# Altium PCB Bhishma_SlaveLayout.PcbDoc (part 1 of 2)
Units mil, origin at the board's own origin, x right, y up, seen from the top; angles counter-clockwise.
Board outline 3750 x 3500 mil, 3 copper layers (Top Layer, Internal Plane 13, Bottom Layer); 96 components, 63 nets, 347 pads, 425 vias.
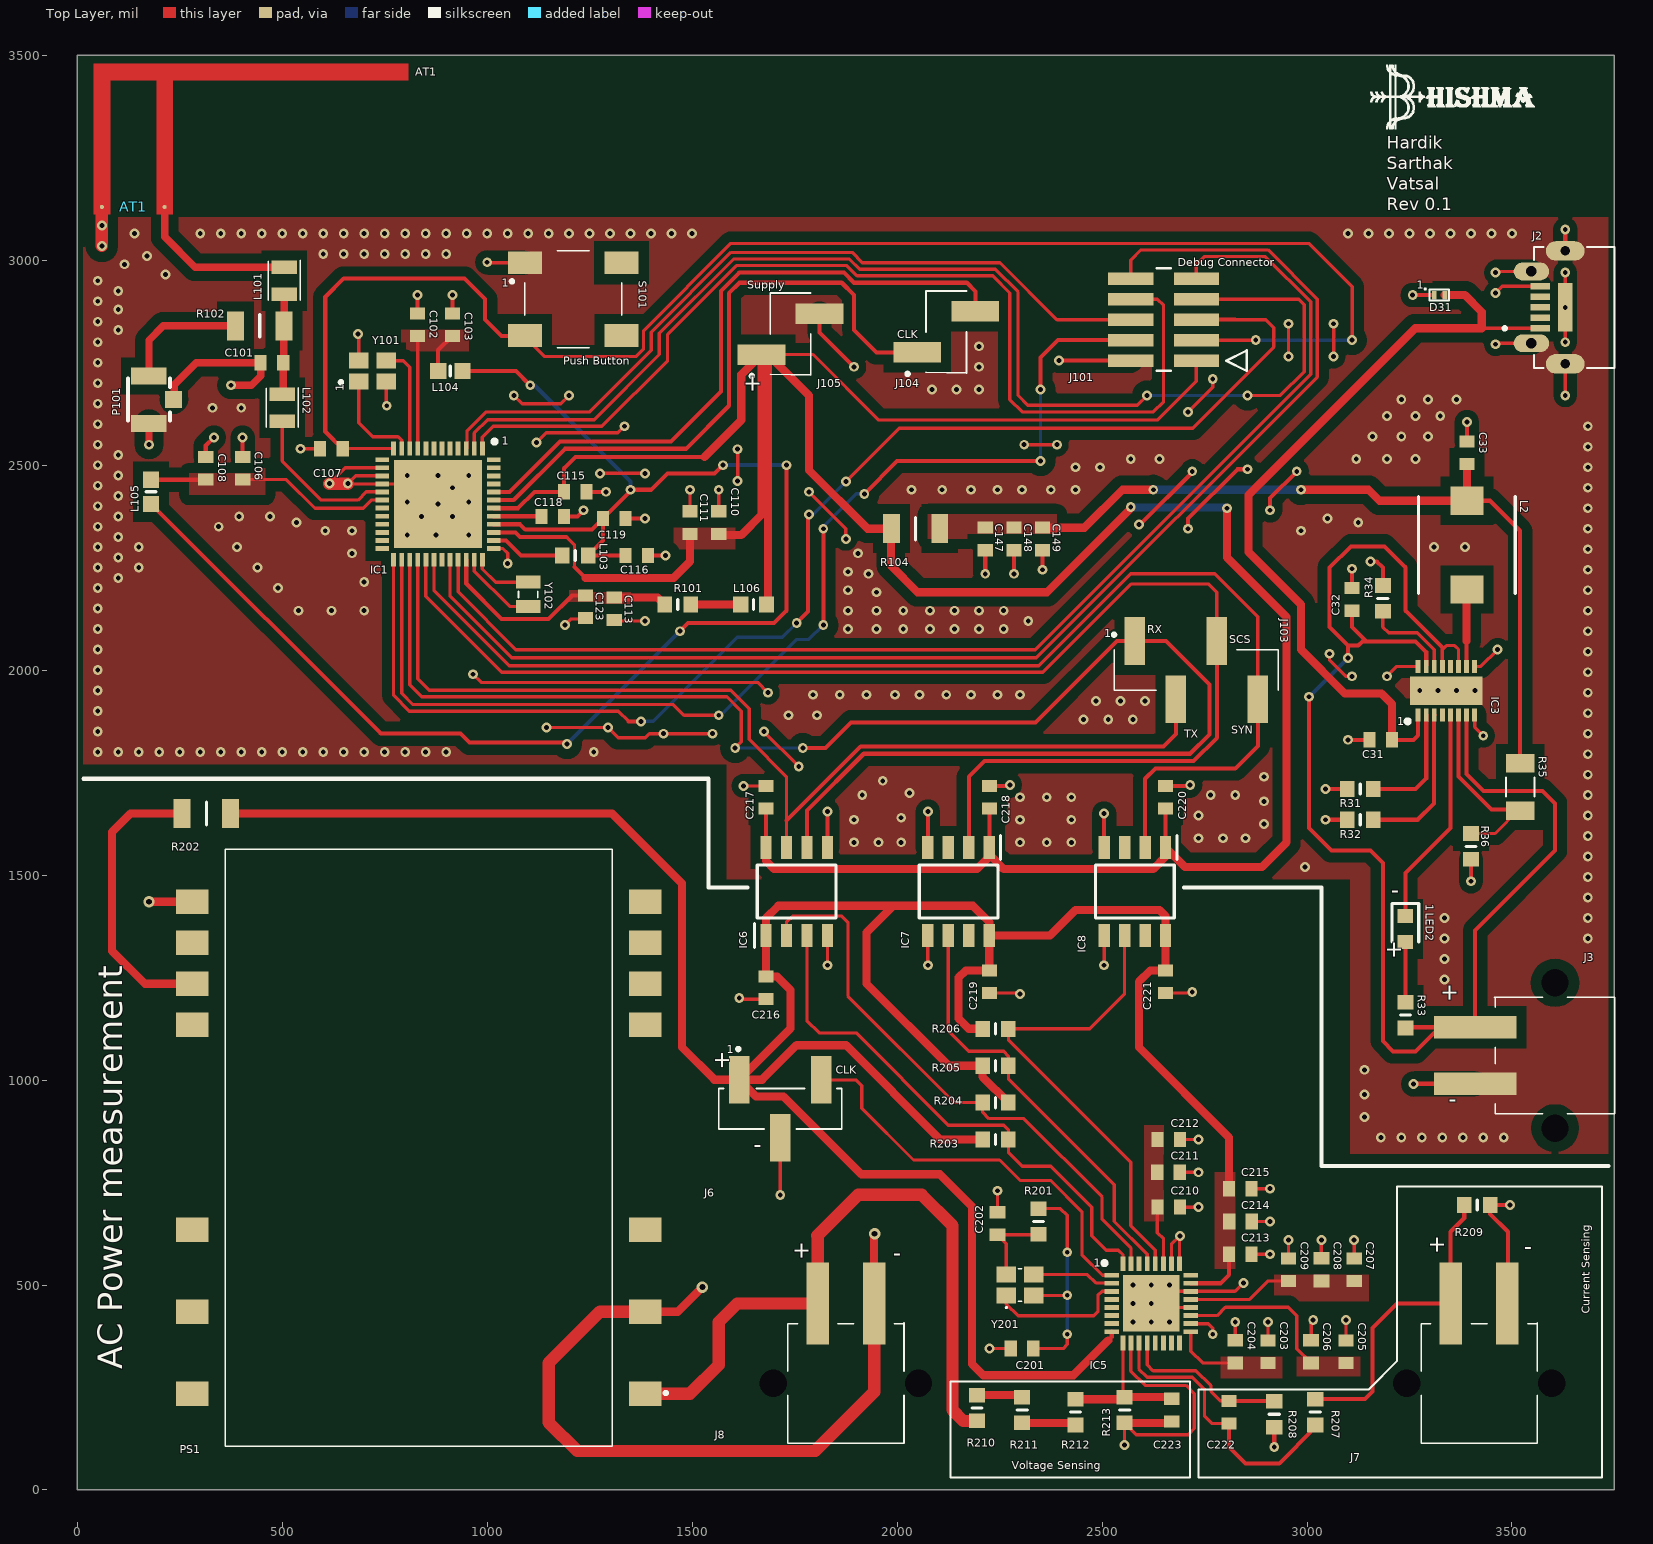
[diagram p0: Top Layer view]
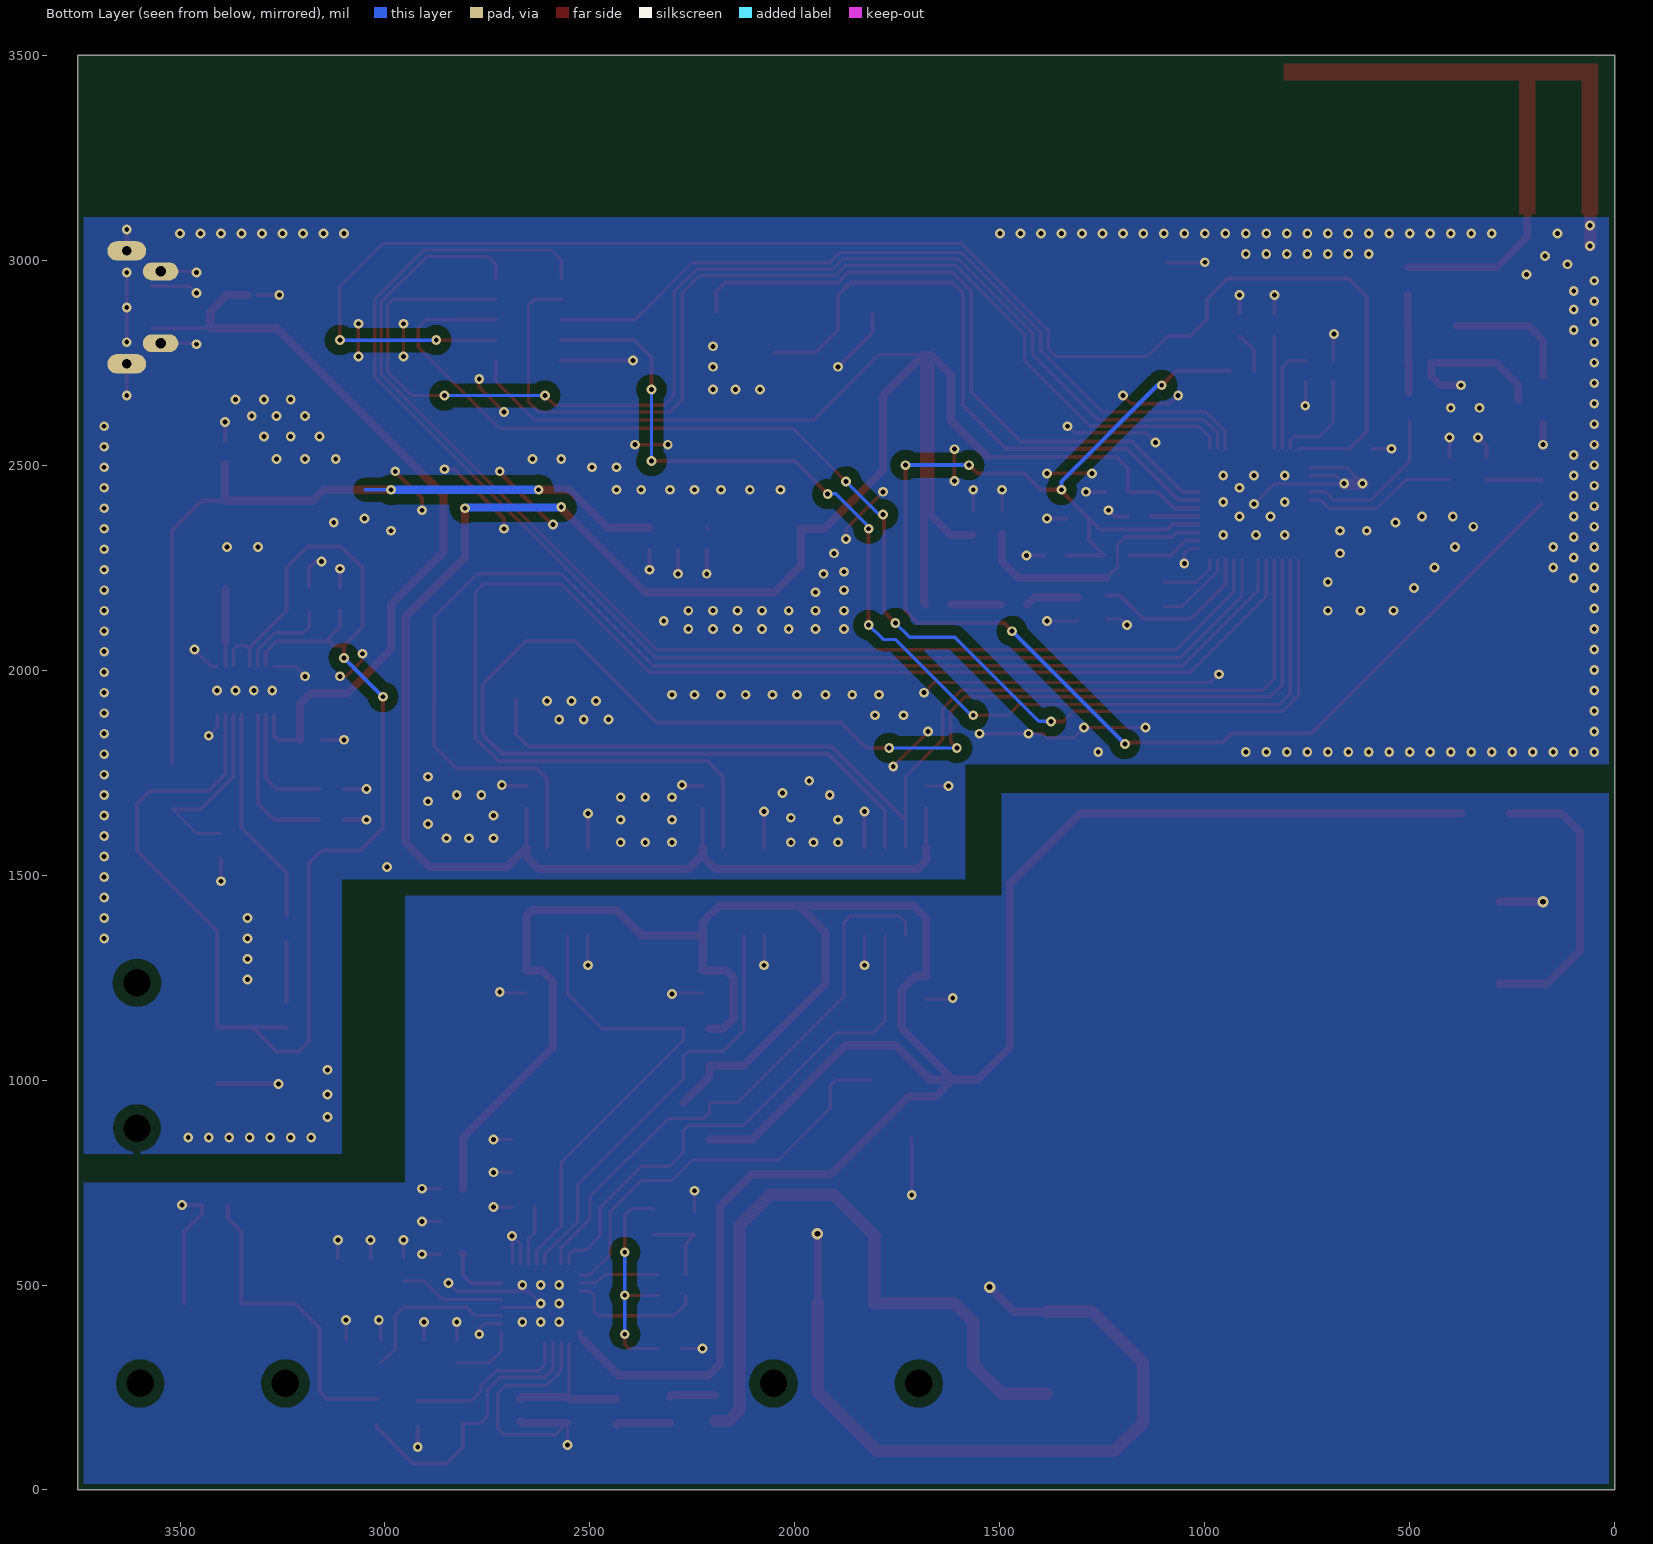
[diagram p1: Bottom Layer view, seen from below]
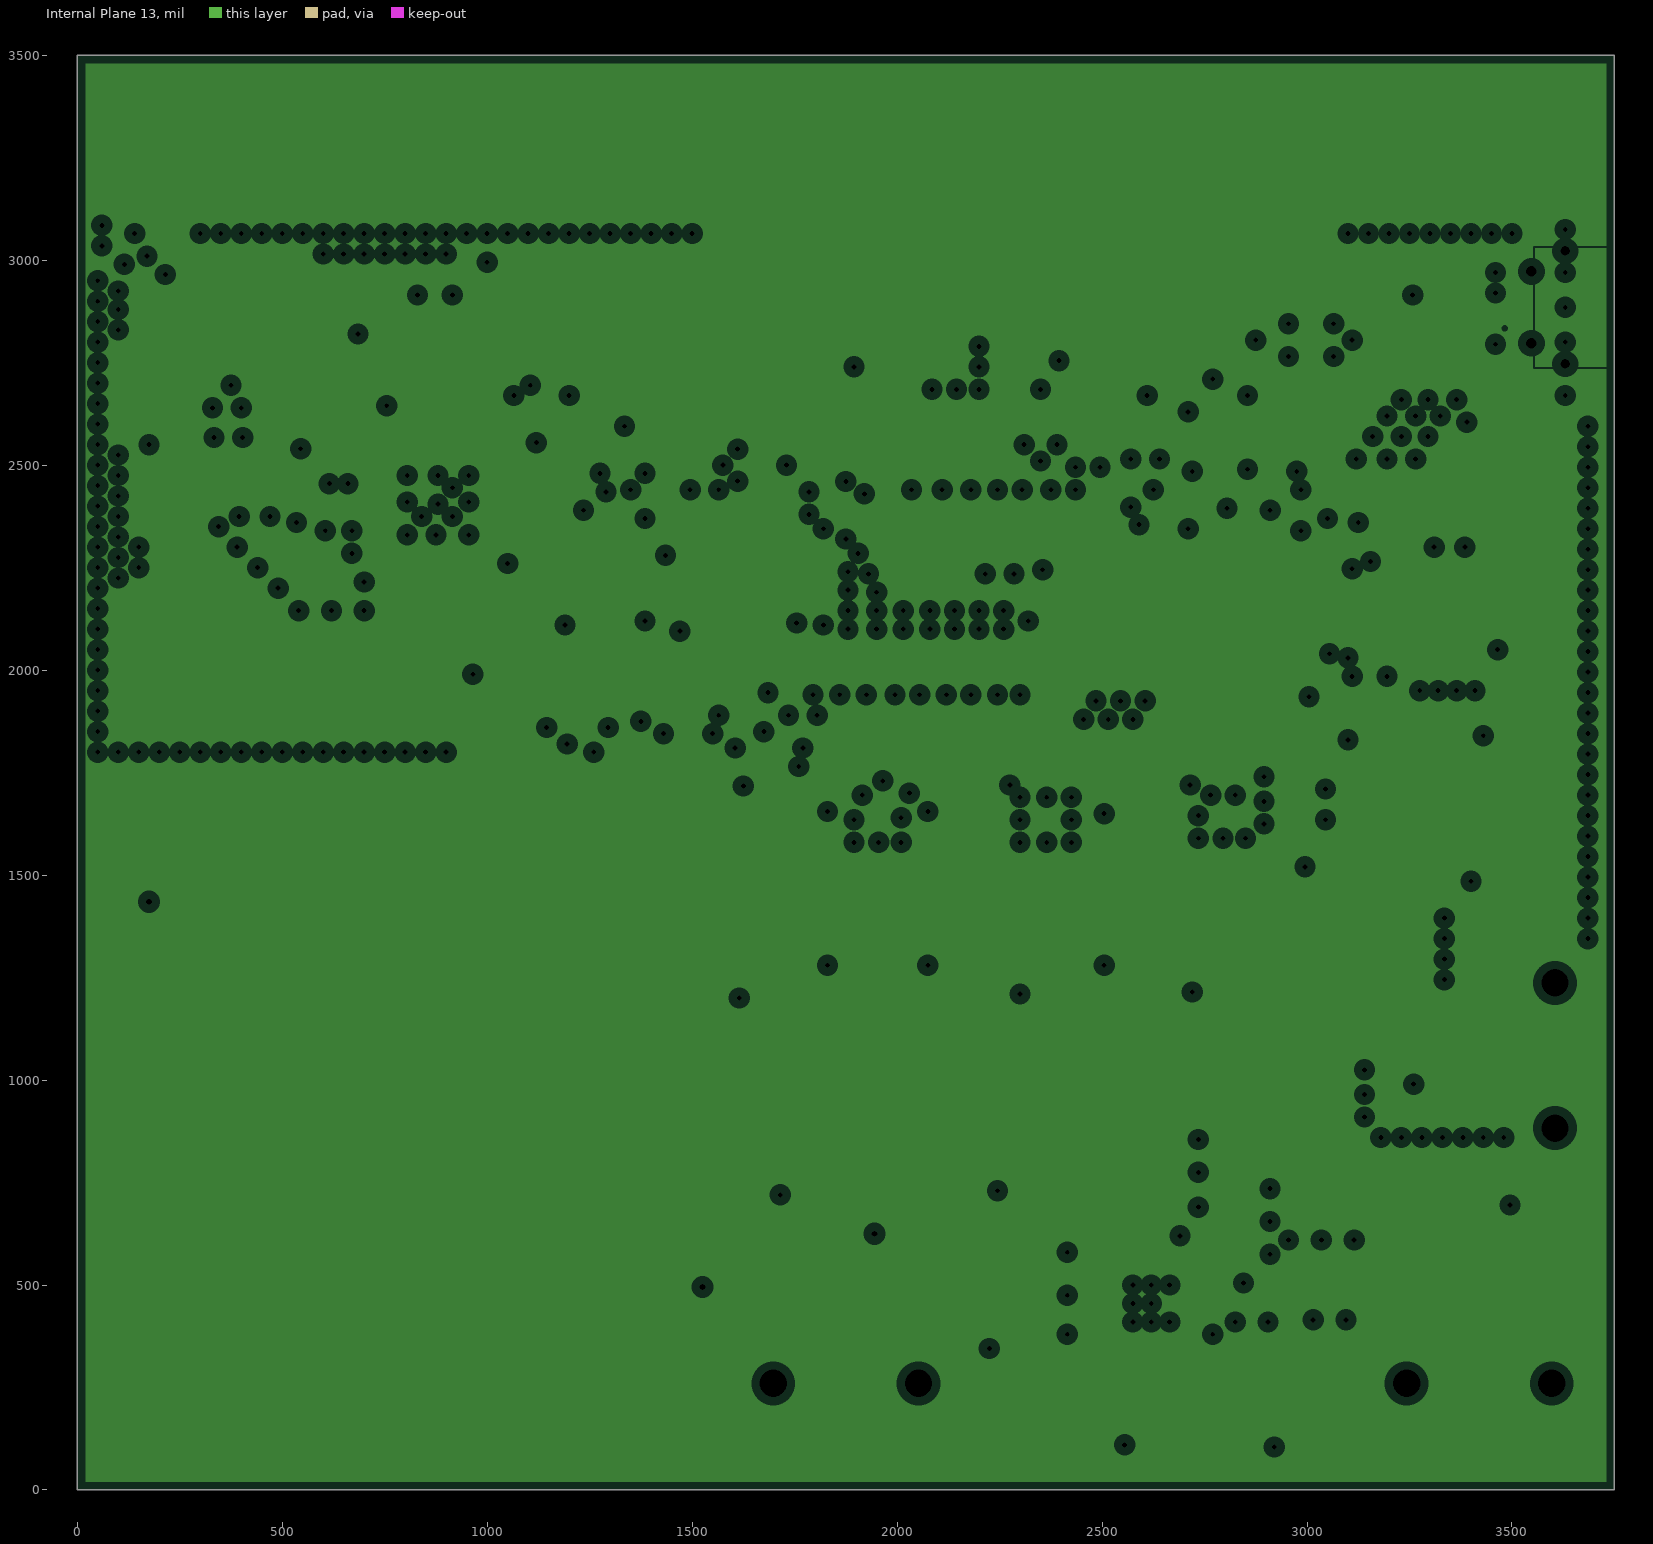
[diagram p2: Internal Plane 13, clearances drawn from the general rule]
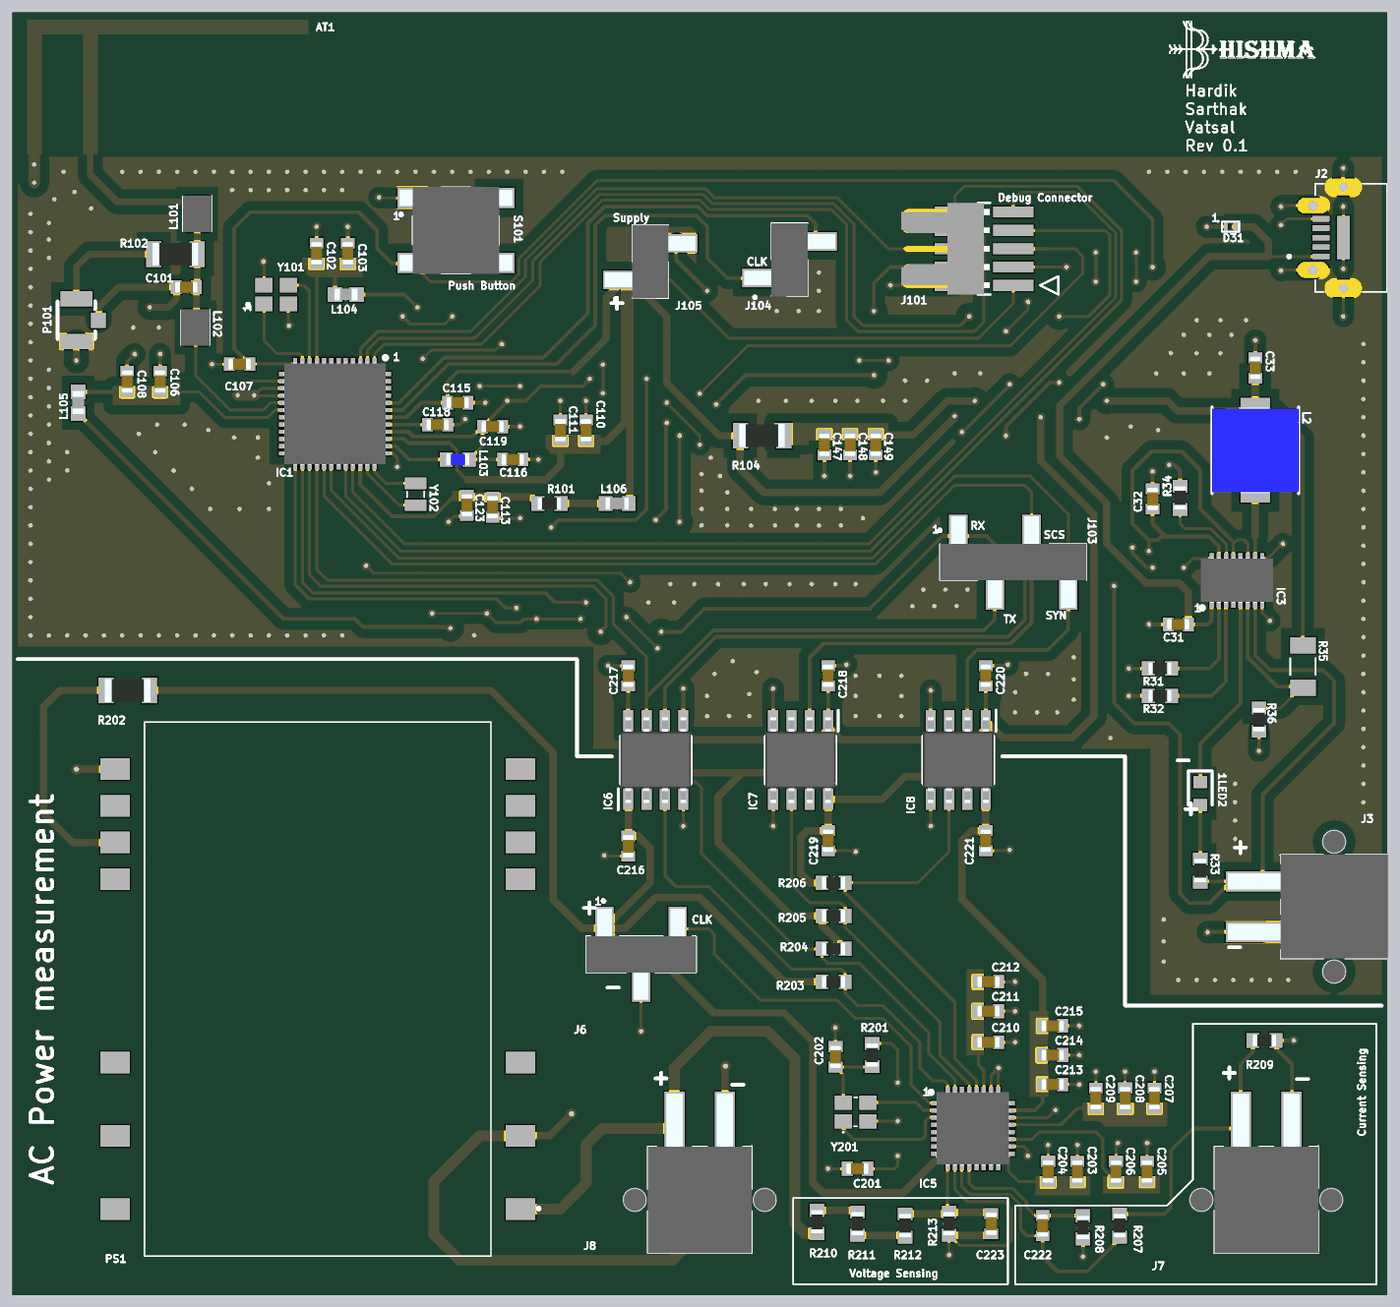
[diagram p4: 3D render of the assembled board from above, using the file's embedded part models]

## Layer stack, top to bottom
Top Solder: solder mask 0.4, Solder Resist, Dk 3.5
Top Layer: signal copper 1.4
Dielectric1: dielectric 12.6, FR-4, Dk 4.8
Internal Plane 13: plane copper 1.4
Dielectric2: dielectric 12.6, FR-4, Dk 4.8
Bottom Layer: signal copper 1.4
Bottom Solder: solder mask 0.4, Solder Resist, Dk 3.5

## Board outline
0,0 0,3500 3750,3500 3750,0

## Design rules (kind name [scope] priority, off if disabled: settings)
Clearance [All] p1: gap=10 ignorepadtopadclearanceinfootprint=TRUE except(0: Arc-Hole Track-Hole SMDPad-Hole THPad-Hole Via-Hole Fill-Hole Poly-Hole Region-Hole Text-Hole; 5: SMDPad-SMDPad; 8: Arc-SMDPad Track-Track Track-SMDPad; 20: Arc-Via Track-Via THPad-Via Via-Via; 25: Arc-Poly Track-Poly SMDPad-Poly THPad-Poly Via-Poly Fill-Poly Poly-Poly)
FabricationTestPointUsage TestPointUsage [All] p1: valid=0 allowmultiple=FALSE
FabricationTestpoint Testpoint [All] p1: side=3 testpointundercomponent=TRUE minsize=40 maxsize=100 preferedsize=60 minholesize=0 maxholesize=40 preferedholesize=32 testpointgrid=1 allowsidetop=TRUE allowsidebottom=TRUE usegrid=TRUE gridtolerance=0.01
PlaneClearance [All] p1: clearance=20
PlaneConnect [All] p1: planeconnectstyle=Relief reliefexpansion=20 reliefentries=4 reliefconductorwidth=10 reliefairgap=10
PolygonConnect PolygonConnect_6 [All vs IsNamedPolygon('BGND')] p1: connectstyle=Direct reliefconductorwidth=10 reliefentries=4 polygonreliefangle="90 Angle" airgapwidth=10
PolygonConnect PolygonConnect_4 [All vs IsNamedPolygon('VCC')] p2: connectstyle=Direct reliefconductorwidth=10 reliefentries=4 polygonreliefangle="90 Angle" airgapwidth=10
PolygonConnect PolygonConnect_1 [All vs IsNamedPolygon('NetC33_2')] p3: connectstyle=Direct reliefconductorwidth=10 reliefentries=4 polygonreliefangle="90 Angle" airgapwidth=10
PolygonConnect PolygonConnect_13 [All vs IsNamedPolygon('VREF1')] p4: connectstyle=Direct reliefconductorwidth=10 reliefentries=4 polygonreliefangle="90 Angle" airgapwidth=10
PolygonConnect PolygonConnect_12 [All vs IsNamedPolygon('VREF2')] p5: connectstyle=Direct reliefconductorwidth=10 reliefentries=4 polygonreliefangle="90 Angle" airgapwidth=10
PolygonConnect PolygonConnect_11 [All vs IsNamedPolygon('VDDA')] p6: connectstyle=Direct reliefconductorwidth=10 reliefentries=4 polygonreliefangle="90 Angle" airgapwidth=10
PolygonConnect PolygonConnect_10 [All vs IsNamedPolygon('NetC33_2')] p7: connectstyle=Direct reliefconductorwidth=10 reliefentries=4 polygonreliefangle="90 Angle" airgapwidth=10
PolygonConnect PolygonConnect_9 [All vs IsNamedPolygon('VDDD')] p8: connectstyle=Direct reliefconductorwidth=10 reliefentries=4 polygonreliefangle="90 Angle" airgapwidth=10
PolygonConnect PolygonConnect_8 [All vs IsNamedPolygon('PAVDD_MCU')] p9: connectstyle=Direct reliefconductorwidth=10 reliefentries=4 polygonreliefangle="90 Angle" airgapwidth=10
PolygonConnect PolygonConnect_7 [All vs IsNamedPolygon('RFVDD_MCU')] p10: connectstyle=Direct reliefconductorwidth=10 reliefentries=4 polygonreliefangle="90 Angle" airgapwidth=10
PolygonConnect PolygonConnect_5 [All vs IsNamedPolygon('IOVDD')] p11: connectstyle=Direct reliefconductorwidth=10 reliefentries=4 polygonreliefangle="90 Angle" airgapwidth=10
PolygonConnect PolygonConnect_3 [All vs IsNamedPolygon('NETC33_2')] p12: connectstyle=Direct reliefconductorwidth=10 reliefentries=4 polygonreliefangle="90 Angle" airgapwidth=10
PolygonConnect PolygonConnect_2 [All vs IsNamedPolygon('AVDD')] p13: connectstyle=Direct reliefconductorwidth=10 reliefentries=4 polygonreliefangle="90 Angle" airgapwidth=10
PolygonConnect [All] p14: thpad.connectstyle=Relief thpad.reliefconductorwidth=10 thpad.reliefentries=4 thpad.polygonreliefangle="90 Angle" thpad.airgapwidth=10 smdpad.connectstyle=Relief smdpad.reliefconductorwidth=10 smdpad.reliefentries=4 smdpad.polygonreliefangle="90 Angle" smdpad.airgapwidth=10 via.connectstyle=Direct via.reliefconductorwidth=10 via.reliefentries=4 via.polygonreliefangle="90 Angle" via.airgapwidth=10
RoutingVias [All] p1: holewidth=12 width=24 viastyle="Through Hole" minholewidth=10 minwidth=20 maxholewidth=14 maxwidth=28
SilkToSolderMaskClearance SilkscreenOverComponentPads [IsPad] p1: minsilkscreentomaskgap=10 clearancetoexposedcopper=TRUE
SolderMaskExpansion [All] p1: expansion=4
Width [All] p1: maxlimit=20 minlimit=8 preferedwidth=10
25 further rules are at their usual default settings.

## Classes and differential pairs
component class U_EFR32BG13_Slave: C101 C102 C103 C106 C107 C108 C110 C111 C113 C115 C116 C118 C119 C123 C147 C148 C149 IC1 J101 J103 J104 J105 L101 L102 L103 L104 L105 L106 P101 R101 R102 R104 S101 Y102
component class U_PowerManagementSlave: C31 C32 C33 D31 IC3 J2 J3 L2 LED2 R31 R32 R33 R34 R35 R36
component class U_STPM34Energy_measurement: C201 C202 C203 C204 C205 C206 C207 C208 C209 C210 C211 C212 C213 C214 C215 C216 C217 C218 C219 C220 C221 C222 C223 IC5 IC6 IC7 IC8 J6 J7 J8 PS1 R201 R202 R203 R204 R205 R206 R207 R208 R209 R210 R211 R212 R213 Y201

## Components (designator, comment, footprint, x,y, rotation, side; value= is the part's Value field where it differs from the comment)
AT1 "INVERTED_F" ANT_INV_F_2.4_GHZ_FS_19.5MM_MIR 40.32,3112.15 r0 top net-tie
C31 "81-GCM188R71C105K64D" CAPC1608X90N 3180,1830 r0 top value=1uF
C32 "81-GRM188C71E225KE1J" CAPC1608X90N 3110,2172.44 r90 top value=2.2uF
C33 "581-06036D226MAT2A" CAPC1608X90N 3390,2530 r270 top value=22u
C101 "" CAPC1608X90N 475,2750 r0 top value=1.5pF
C102 "81-GCG1885G1H101JA1D" CAPC1608X90N 830,2842.56 r90 top value=100pF
C103 "81-GCG1885G1H100JA1D" CAPC1608X90N 915,2842.56 r90 top value=10pF
C106 "81-GCM188R71E224K55D" CAPC1608X90N 403.5,2492.56 r90 top value=220nF
C107 "581-0603YC104JAT4A" CAPC1608X90N 620,2540 r0 top value=100nF
C108 "81-GCG1885G1H100JA1D" CAPC1608X90N 313.5,2492.56 r90 top value=10pF
C110 "81-GRM188R61E106KA3D" CAPC1608X90N 1565,2360 r270 top value="10 uF"
C111 "81-GCM188R71C105K64D" CAPC1608X90N 1495,2360 r270 top value=1uF
C113 "81-GCM1887U1H103JA6J" CAPC1608X90N 1310,2150 r90 top value=10nF
C115 "81-GCM188R71C105K64D" CAPC1608X90N 1215,2435 r0 top value=1uF
C116 "81-GCM188R71C105K64D" CAPC1608X90N 1365,2280 r0 top value=1uF
C118 "81-GCM188R71C105K64D" CAPC1608X90N 1160,2375 r0 top value=1uF
C119 "581-0603YC104JAT4A" CAPC1608X90N 1310,2370 r0 top value=100nF
C123 "81-GRM188R61E106KA3D" CAPC1608X90N 1240,2155 r90 top value=10uF
C147 "581-0603YC104JAT4A" CAPC1608X90N 2215,2320 r90 top value=100nF
C148 "581-0603YC104JAT4A" CAPC1608X90N 2285,2320 r90 top value=100nF
C149 "81-GRM188R61E106KA3D" CAPC1608X90N 2355,2320 r90 top value=10uF
C201 "80-C0603C150F5GACTU" CAPC1608X87N 2305,345 r0 top value=15pF
C202 "80-C0603C150F5GACTU" CAPC1608X87N 2245,650 r270 top value=15pF
C203 "581-0603YC104JAT4A" CAPC1608X90N 2905,337.44 r270 top value=100nF
C204 "80-C0603C151J4G" CAPC1608X87N 2825,337.44 r270 top value=150pF
C205 "581-0603YC104JAT4A" CAPC1608X90N 3095,337.44 r270 top value=100nF
C206 "80-C0603C151J4G" CAPC1608X87N 3010,337.44 r270 top value=150pF
C207 "581-0603YC104JAT4A" CAPC1608X90N 3115,537.44 r270 top value=100nF
C208 "80-C0603C151J4G" CAPC1608X87N 3035,537.44 r270 top value=150pF
C209 "81-GCM188R71C105K64D" CAPC1608X90N 2955,537.44 r270 top value=1uF
C210 "581-0603YC104JAT4A" CAPC1608X90N 2662.44,690 r180 top value=100nF
C211 "80-C0603C151J4G" CAPC1608X87N 2662.44,775 r180 top value=150pF
C212 "81-GRM188R61C475KAJD" CAPC1608X90N 2662.44,855 r180 top value=4.7uF
C213 "581-0603YC104JAT4A" CAPC1608X90N 2837.44,575 r180 top value=100nF
C214 "80-C0603C151J4G" CAPC1608X87N 2837.44,655 r180 top value=150pF
C215 "81-GCM188R71C105K64D" CAPC1608X90N 2837.44,735 r180 top value=1uF
C216 "581-0603YC104JAT4A" CAPC1608X90N 1680,1225 r270 top value=100nF
C217 "581-0603YC104JAT4A" CAPC1608X90N 1680,1690 r90 top value=100nF
C218 "581-0603YC104JAT4A" CAPC1608X90N 2225,1690 r90 top value=100nF
C219 "581-0603YC104JAT4A" CAPC1608X90N 2225,1240 r270 top value=100nF
C220 "581-0603YC104JAT4A" CAPC1608X90N 2655,1690 r90 top value=100nF
C221 "581-0603YC104JAT4A" CAPC1608X90N 2655,1240 r270 top value=100nF
C222 "81-GCM1887U1H103JA6J" CAPC1608X90N 2810,190 r270 top value=10nF
C223 "81-GRM1887U1A223JA1D" CAPC1608X90N 2670,195 r90 top value=22nF
D31 "595-TPD1E10B06DPYT" *DFN100X60X45-2N 3322.8,2915 r0 top value=TPD1E10B06DPYT
IC1 "634-BGP632F512GM48D" QFN50P700X700X90-49N-D 880,2405 r270 top
IC3 "584-LTC3550EDHC#PBF" SON50P300X500X85-17N-D 3340,1950 r90 top value=LTC3550
IC5 "511-STPM34TR" QFN50P500X500X100-33N-D 2620,455 r0 top value=STPM34TR
IC6 "512-FOD8012AR2" SOIC127P594X363-8N 1755,1460 r90 top value=FOD8012AR2
IC7 "512-FOD8001" SOIC127P594X363-8N 2150,1460 r270 top value=FOD8001
IC8 "512-FOD8001" SOIC127P594X363-8N 2580,1460 r270 top value=FOD8001
J2 "490-UJ2-MIBH2-4-SMT" *CUI_UJ2-MIBH2-4-SMT-TR_UJ2-MIBH2-4-SMT-TR(Primary) 3651.65,2885 r90 top value=UJ2-MIBH2-4-SMT-TR
J3 "710-691508110302" 691508110302 3605,1060 r90 top
J6 "538-87898-0306" 878980306 1715,930 r0 top
J7 "710-691508110302" 691508110302 3420,260 r0 top
J8 "710-691508110302" 691508110302 1875,260 r0 top
J101 "200-FTSH10501FDVK" SAMTEC_FTSH-105-01-L-DV 2650,2855 r90 top
J103 "538-87898-0424" 878980424 2730,2000 r0 top
J104 "538-87898-0204" 878980204 2120,2825 r90 top
J105 "538-87898-0204" 878980204 1740,2820 r90 top
L2 "810-SLF6028T-4R7M" INDPM6060X300N 3390,2305 r90 top value=4.7uH
L101 "" LQP03TQ0N6B02D 505,2950 r90 top value=1.9nH
L102 "" LQP03TQ0N6B02D 500,2640 r90 top value=1.9nH
L103 "810-KLZ1608MHR4R7WTD" INDC1608X95N 1215,2280 r0 top value=4.7uH
L104 "81-BLM11A601S" BEADC1608X95N 910,2730 r180 top
L105 "81-BLM11A601S" BEADC1608X95N 180,2435 r90 top
L106 "710-74279266" BEADC1608X100N 1650,2160 r0 top value=CBF102WB
LED2 "630-HSMC-C190" LEDC1608X90N 3240,1368.5 r270 top
P101 "798-U.FL-R-SMT-110" U.FL-R-SMT-1(10) 174.96,2660 r270 top
PS1 "709-IRM03-3.3S" IRM035S 840,835 r90 top value=IRM-03-3.3S
R31 "594-MCT06030D2201BP1" RESC1608X55N 3130,1710 r0 top value=2.2K
R32 "667-ERA-3ARB112V" RESC1608X55N 3130,1635 r0 top value=1.1K
R33 "594-MCT0603MD1001BP5" RESC1608X55N 3240,1158.5 r90 top value=1K
R34 "594-MCT06030D2201BP1" RESC1608X55N 3185,2175 r90 top value=2.2K
R35 "71-TNPW12061M35BEEN" *RESC3216X65N 3520,1715 r90 top value=1.35M
R36 "667-ERA-3AEB3013V" RESC1608X55N 3400,1570 r90 top value=301K
R101 "279-CRGS0603J1R0" RESC1608X55N 1465,2160 r0 top value="1 Ohm"
R102 "71-CRCW12060000Z0EAC" RESC3216X60N 445,2840 r180 top value=0R
R104 "71-CRCW12060000Z0EAC" RESC3216X60N 2045,2345 r180 top value=0R
R201 "594-MCT06030C1004FP5" RESC1608X55N 2345,655 r90 top value=1M
R202 "71-CRCW12060000Z0EAC" RESC3216X60N 315,1650 r0 top value=0R
R203 "594-MCT0603MD1002BP5" RESC1608X55N 2240,855 r180 top value=10K
R204 "594-MCT0603MD1002BP5" RESC1608X55N 2240,945 r0 top value=10K
R205 "594-MCT0603MD1002BP5" RESC1608X55N 2240,1035 r180 top value=10K
R206 "594-MCT0603MD1002BP5" RESC1608X55N 2240,1125 r180 top value=10K
R207 "594-MCT0603PD1001DP5" RESC1608X55N 3020,190 r90 top value=1K
R208 "594-MCT0603PD1001DP5" RESC1608X55N 2920,185 r270 top value=1K
R209 "279-CPF0603B5R9E1" RESC1608X55N 3415,695 r180 top value=6R
R210 "594-MCT06030C2703FP5" RESC1608X55N 2195,200 r90 top value=270K
R211 "594-MCT06030C2703FP5" RESC1608X55N 2305,195 r270 top value=270K
R212 "594-MCT06030C2703FP5" RESC1608X55N 2435,190 r90 top value=270K
R213 "667-ERA-3APB471V" RESC1608X55N 2555,195 r90 top value=470R
S101 "612-LL3301AF065QJ" LL3301FF065QJ 1210,2905 r0 top
Y101 "520-384-8-36Q-CKYT" *XTAL_ECS-384-8-36Q-CKY-TR 720,2730 r0 top
Y102 "428-201410-MC01" CM8V32768TA020125 1100,2185 r270 top value=32.768KHz
Y201 "520-160-8-36B-CKYT" ECS240836QAESTR 2300,500 r0 top value=16MHz

## Footprints (in the part's own frame and the unit in brackets; to place one, negate y for a bottom-side part, rotate by r counter-clockwise, add the part's x,y. Pads: shape width x height; smd on the part's side, far side on the other; paste and mask are expansions set on the pad)
878980204 [mm]
  rect 1.27x2.96 smd: 1(-1.27,1.8) 2(1.27,-1.8)
  silkscreen extent -2.7,-1.25 2.54,2.5, body extent -2.54,-3.15 2.54,3.15, height 8.43
878980306 [mm]
  rect 1.27x2.96 smd: 1(-2.54,1.8) 2(0,-1.8) 3(2.54,1.8)
  silkscreen extent -3.81,-1.25 3.81,3.8, body extent -3.81,-3.15 3.81,3.15, height 10.91
878980424 [mm]
  rect 1.27x2.96 smd: 1(-3.81,1.81) 2(-1.27,-1.81) 3(1.27,1.81) 4(3.81,-1.81)
  silkscreen extent -5.2,-1.25 5.08,2.3, body extent -5.08,-3.16 5.08,3.16, height 9.75
691508110302 [mm]
  rect 1.4x5.1 smd: 1(-1.75,4.95) 2(1.75,4.95)
  round 0.85 hole 1.7 unplated: MH1(-4.5,0) MH2(4.5,0)
  silkscreen extent -3.6,-3.7 3.6,3.75, body extent -5.24,-3.7 5.25,7.36, height 12.3
*CUI_UJ2-MIBH2-4-SMT-TR_UJ2-MIBH2-4-SMT-TR(Primary) [mm]
  rect 0.4x1.2 smd: 1(-1.3,2.1) 2(-0.65,2.1) 3(0,2.1) 4(0.65,2.1) 5(1.3,2.1)
  oval 1.2x2.4 hole 0.6: SH1(-3.5,0.55) SH4(3.5,0.55)
  oval 1.1x2.2 hole 0.65: SH2(-2.225,2.65) SH3(2.225,2.65)
  rect 3x0.9 smd: SH5(0,0.55)
  Internal Plane 13 circle w0.2: c-1.3,4.3 r0.1
  Internal Plane 13 circle w0.2: c-1.3,4.3 r0.1
  Internal Plane 13 lines w0.127: -3.75,2.5 -3.75,-2.5 ; -3.75,2.5 3.75,2.5 ; -3.75,2.5 -3.75,-2.5 ; -3.75,2.5 3.75,2.5 ; 3.75,2.5 3.75,-2.5 ; 3.75,2.5 3.75,-2.5 ; -3.75,-2.5 3.75,-2.5 ; -3.75,-2.5 3.75,-2.5
  silkscreen extent -3.75,-2.5 3.75,4.4
*DFN100X60X45-2N [mm]
  rect 0.28x0.52 smd: 1(-0.325,0) 2(0.325,0)
  silkscreen extent -0.92,-0.35 0.6,0.42
*RESC3216X65N [mm]
  rect 1.13x1.77 smd: 1(-1.47,0) 2(1.47,0)
  silkscreen extent -0.58,-0.88 0.58,0.88
*XTAL_ECS-384-8-36Q-CKY-TR [mm]
  rect 1.2x1 smd: 1(-0.85,-0.65) 2(0.85,-0.65) 3(0.85,0.65) 4(-0.85,0.65)
  silkscreen extent -2.05,-0.8 -1.85,-0.6
ANT_INV_F_2.4_GHZ_FS_19.5MM_MIR [mil] "F-ANTENNA INVERSE 19.5 mm"
  round 10 smd paste-10 mask-10: 1(172.68,17.72) 2(19.68,17.85)
  Top Layer region: 0,367.2 767.72,367.2 767.72,327.07 193,327.07 193,0 153,0 153,327.07 40,327.07 40,0 20,0 0,0
BEADC1608X95N [mm]
  rect 1x1 smd: 1(-0.75,0) 2(0.75,0)
  silkscreen extent 0,-0.3 0,0.3, body extent -0.8,-0.4 0.8,0.4, height 0.95
BEADC1608X100N [mm]
  rect 0.95x1 smd: 1(-0.8,0) 2(0.8,0)
  silkscreen extent 0,-0.3 0,0.3, body extent -0.8,-0.4 0.8,0.4, height 1
CAPC1608X87N [mm]
  rect 0.78x0.98 smd: 1(-0.7,0) 2(0.7,0)
  body extent -0.8,-0.4 0.8,0.4, height 0.87
CAPC1608X90N [mm]
  rect 0.75x0.94 smd: 1(-0.7,0) 2(0.7,0)
  body extent -0.8,-0.4 0.8,0.4, height 0.9
CM8V32768TA020125 [mm]
  rect 0.8x1.5 smd: 1(-0.75,0) 2(0.75,0)
  silkscreen extent -0.2,-0.6 0.2,0.6
ECS240836QAESTR [mm]
  rect 1.2x1 smd: 1(-0.85,-0.65) 2(0.85,-0.65) 3(0.85,0.65) 4(-0.85,0.65)
  silkscreen extent -0.9,-1.45 0.1,1
INDC1608X95N [mm]
  rect 0.9x1 smd: 1(-0.8,0) 2(0.8,0)
  silkscreen extent 0,-0.3 0,0.3, body extent -0.8,-0.4 0.8,0.4, height 0.95
INDPM6060X300N [mm]
  rect 1.75x2.05 smd: 1(-2.75,0) 2(2.75,0)
  silkscreen extent -3,-3 3,3, body extent -3,-3 3,3, height 3
IRM035S [mm]
  rect 1.5x2.03 smd: 1(-15.24,-13.86) 3(-10.16,-13.86) 5(-5.08,-13.86) 10(7.62,-13.86) 11(10.16,-13.86) 12(12.7,-13.86) 13(15.24,-13.86) 14(15.24,14.21) 15(12.7,14.21) 16(10.16,14.21) 17(7.62,14.21) 22(-5.08,14.21) 24(-10.16,14.21) 26(-15.24,14.21)
  silkscreen extent -18.5,-15.22 18.5,12.17
LEDC1608X90N [mm]
  rect 0.85x0.95 smd: 1(-0.8,0) 2(0.8,0)
  silkscreen extent -1.58,-0.82 0.8,0.82
LL3301FF065QJ [mm]
  rect 2.1x1.4 smd: 1(-3,2.25) 2(3,2.25) 3(-3,-2.25) 4(3,-2.25)
  silkscreen extent -3.9,-3 3,3, body extent -3.91,-3 3.91,3, height 7.4
LQP03TQ0N6B02D [mm]
  rect 0.835x1.6 smd: 1(-0.833,0) 2(0.833,0)
  silkscreen extent -1.2,-1 1.25,1, body extent -1.25,-1 1.25,1, height 0.7
QFN50P500X500X100-33N-D [mm]
  rect 0.9x0.3 smd: 1(-2.45,1.75) 2(-2.45,1.25) 3(-2.45,0.75) 4(-2.45,0.25) 5(-2.45,-0.25) 6(-2.45,-0.75) 7(-2.45,-1.25) 8(-2.45,-1.75) 17(2.45,-1.75) 18(2.45,-1.25) 19(2.45,-0.75) 20(2.45,-0.25) 21(2.45,0.25) 22(2.45,0.75) 23(2.45,1.25) 24(2.45,1.75)
  rect 0.3x0.9 smd: 9(-1.75,-2.45) 10(-1.25,-2.45) 11(-0.75,-2.45) 12(-0.25,-2.45) 13(0.25,-2.45) 14(0.75,-2.45) 15(1.25,-2.45) 16(1.75,-2.45) 25(1.75,2.45) 26(1.25,2.45) 27(0.75,2.45) 28(0.25,2.45) 29(-0.25,2.45) 30(-0.75,2.45) 31(-1.25,2.45) 32(-1.75,2.45)
  rect 3.5x3.5 smd: 33(0,0)
  silkscreen extent -3.02,2.38 -2.77,2.62, body extent -2.55,-2.55 2.55,2.55, height 1
QFN50P700X700X90-49N-D [mm]
  rect 0.85x0.3 smd: 1(-3.45,2.75) 2(-3.45,2.25) 3(-3.45,1.75) 4(-3.45,1.25) 5(-3.45,0.75) 6(-3.45,0.25) 7(-3.45,-0.25) 8(-3.45,-0.75) 9(-3.45,-1.25) 10(-3.45,-1.75) 11(-3.45,-2.25) 12(-3.45,-2.75) 25(3.45,-2.75) 26(3.45,-2.25) 27(3.45,-1.75) 28(3.45,-1.25) 29(3.45,-0.75) 30(3.45,-0.25) 31(3.45,0.25) 32(3.45,0.75) 33(3.45,1.25) 34(3.45,1.75) 35(3.45,2.25) 36(3.45,2.75)
  rect 0.3x0.85 smd: 13(-2.75,-3.45) 14(-2.25,-3.45) 15(-1.75,-3.45) 16(-1.25,-3.45) 17(-0.75,-3.45) 18(-0.25,-3.45) 19(0.25,-3.45) 20(0.75,-3.45) 21(1.25,-3.45) 22(1.75,-3.45) 23(2.25,-3.45) 24(2.75,-3.45) 37(2.75,3.45) 38(2.25,3.45) 39(1.75,3.45) 40(1.25,3.45) 41(0.75,3.45) 42(0.25,3.45) 43(-0.25,3.45) 44(-0.75,3.45) 45(-1.25,3.45) 46(-1.75,3.45) 47(-2.25,3.45) 48(-2.75,3.45)
  rect 5.45x5.45 smd: 49(0,0)
  silkscreen extent -4,3.38 -3.75,3.63, body extent -3.55,-3.55 3.55,3.55, height 0.9
RESC1608X55N [mm]
  rect 0.9x1 smd: 1(-0.8,0) 2(0.8,0)
  silkscreen extent 0,-0.31 0,0.31, body extent -0.8,-0.41 0.8,0.41, height 0.55
RESC3216X60N [mm]
  rect 1.05x1.8 smd: 1(-1.5,0) 2(1.5,0)
  silkscreen extent 0,-0.7 0,0.7, body extent -1.58,-0.8 1.58,0.8, height 0.6
SAMTEC_FTSH-105-01-L-DV [mil]
  rect 30x110 smd: 1(-100,-80) 2(-100,80) 3(-50,-80) 4(-50,80) 5(0,-80) 6(0,80) 7(50,-80) 8(50,80) 9(100,-80) 10(100,80)
  silkscreen extent -125,-203 125,17, body extent -125,-16 125,225, height 115
SOIC127P594X363-8N [mm]
  rect 1.45x0.7 smd: 1(-2.725,1.905) 2(-2.725,0.635) 3(-2.725,-0.635) 4(-2.725,-1.905) 5(2.725,-1.905) 6(2.725,-0.635) 7(2.725,0.635) 8(2.725,1.905)
  silkscreen extent -3.45,-2.44 1.65,2.61, body extent -2.97,-2.44 2.97,2.44, height 3.63
SON50P300X500X85-17N-D [mm]
  rect 0.8x0.3 smd: 1(-1.5,1.75) 2(-1.5,1.25) 3(-1.5,0.75) 4(-1.5,0.25) 5(-1.5,-0.25) 6(-1.5,-0.75) 7(-1.5,-1.25) 8(-1.5,-1.75) 9(1.5,-1.75) 10(1.5,-1.25) 11(1.5,-0.75) 12(1.5,-0.25) 13(1.5,0.25) 14(1.5,0.75) 15(1.5,1.25) 16(1.5,1.75)
  rect 1.75x4.5 smd: 17(0,0)
  silkscreen extent -2.02,2.27 -1.78,2.52, body extent -1.55,-2.5 1.55,2.5, height 0.85
U.FL-R-SMT-1(10) [mm]
  rect 1.05x2.2 smd: 1(-1.475,0) 2(1.475,0)
  rect 1.05x1.05 smd: 3(0,1.525)
  silkscreen extent -1.3,-1.3 1.3,1.3

## Part data
C31 C111 C115 C116 C118 C209 C215: library part GCM188R71C105KA64D, "Capacitor", Manufacturer_Name="Murata Electronics", RS Part Number=7900562P, Datasheet Link=https://psearch.en.murata.com/capacitor/product/GCM188R71C105KA64%23.html, Height=0.9mm, Manufacturer_Part_Number=GCM188R71C105KA64D, Mouser Part Number=81-GCM188R71C105K64D, Mouser Price/Stock=https://www.mouser.com/Search/Refine.aspx?Keyword=81-GCM188R71C105K64D, RS Price/Stock=http://uk.rs-online.com/web/p/products/7900562P
C32: library part GRM188C71E225KE11J, "Capacitor", Manufacturer_Name="Murata Electronics", Datasheet Link=https://psearch.en.murata.com/capacitor/product/GRM188C71E225KE11%23.html, Height=0.9mm, Manufacturer_Part_Number=GRM188C71E225KE11J, Mouser Part Number=81-GRM188C71E225KE1J, Mouser Price/Stock=https://www.mouser.com/Search/Refine.aspx?Keyword=81-GRM188C71E225KE1J
C33: library part 06036D226MAT2A, "Capacitor", Manufacturer_Name=AVX, Datasheet Link=https://componentsearchengine.com/Datasheets/1/06031A100FAT2A.pdf, Height=0.9mm, Manufacturer_Part_Number=06036D226MAT2A, Mouser Part Number=581-06036D226MAT2A, Mouser Price/Stock=https://www.mouser.com/Search/Refine.aspx?Keyword=581-06036D226MAT2A
C101: library part GRM1885C1H1R5CA01D, "Capacitor", Manufacturer_Name="Murata Electronics", RS Part Number=7769236, Datasheet Link=http://www.murata.com/~/media/webrenewal/support/library/catalog/products/capacitor/mlcc/c02e.pdf, Height=0.9mm, Manufacturer_Part_Number=GRM1885C1H1R5CA01D, RS Price/Stock=https://uk.rs-online.com/web/p/products/7769236
C102: library part GCG1885G1H101JA01D, "Capacitor", Manufacturer_Name="Murata Electronics", Datasheet Link=https://psearch.en.murata.com/capacitor/product/GCG1885G1H101JA01%23.html, Height=0.9mm, Manufacturer_Part_Number=GCG1885G1H101JA01D, Mouser Part Number=81-GCG1885G1H101JA1D, Mouser Price/Stock=https://www.mouser.com/Search/Refine.aspx?Keyword=81-GCG1885G1H101JA1D
C103 C108: library part GCG1885G1H100JA01D, "Capacitor", Manufacturer_Name="Murata Electronics", Datasheet Link=https://psearch.en.murata.com/capacitor/product/GCG1885G1H100JA01%23.html, Height=0.9mm, Manufacturer_Part_Number=GCG1885G1H100JA01D, Mouser Part Number=81-GCG1885G1H100JA1D, Mouser Price/Stock=https://www.mouser.com/Search/Refine.aspx?Keyword=81-GCG1885G1H100JA1D
C106: library part GCM188R71E224KA55D, "Capacitor", Manufacturer_Name="Murata Electronics", RS Part Number=7234976P, Datasheet Link=https://psearch.en.murata.com/capacitor/product/GCM188R71E224KA55%23.html, Height=0.9mm, Manufacturer_Part_Number=GCM188R71E224KA55D, Mouser Part Number=81-GCM188R71E224K55D, Mouser Price/Stock=https://www.mouser.com/Search/Refine.aspx?Keyword=81-GCM188R71E224K55D, RS Price/Stock=http://uk.rs-online.com/web/p/products/7234976P
C107 C119 C147 C148 C203 C205 C207 C210 C213 C216 C217 C218 C219 C220 C221: library part 0603YC104JAT4A, "Capacitor", Manufacturer_Name=AVX, Datasheet Link=https://componentsearchengine.com/Datasheets/1/06031A100FAT2A.pdf, Height=0.9mm, Manufacturer_Part_Number=0603YC104JAT4A, Mouser Part Number=581-0603YC104JAT4A, Mouser Price/Stock=https://www.mouser.com/Search/Refine.aspx?Keyword=581-0603YC104JAT4A
C110 C123 C149: library part GRM188R61E106KA73D, "Capacitor", Manufacturer_Name="Murata Electronics", Datasheet Link=http://componentsearchengine.com/Datasheets/1/GRM188R61E106KA73D.pdf, Height=0.9mm, Manufacturer_Part_Number=GRM188R61E106KA73D, Mouser Part Number=81-GRM188R61E106KA3D, Mouser Price/Stock=https://www.mouser.com/Search/Refine.aspx?Keyword=81-GRM188R61E106KA3D
C113 C222: library part GCM1887U1H103JA16J, "Capacitor", Manufacturer_Name="Murata Electronics", Datasheet Link=https://psearch.en.murata.com/capacitor/product/GCM1887U1H103JA16%23.html, Height=0.9mm, Manufacturer_Part_Number=GCM1887U1H103JA16J, Mouser Part Number=81-GCM1887U1H103JA6J, Mouser Price/Stock=https://www.mouser.com/Search/Refine.aspx?Keyword=81-GCM1887U1H103JA6J
C201 C202: library part C0603C150F5GACTU, "Capacitor", Manufacturer_Name=Kemet, Datasheet Link=https://content.kemet.com/datasheets/KEM_C1003_C0G_SMD.pdf, Height=0.87mm, Manufacturer_Part_Number=C0603C150F5GACTU, Mouser Part Number=80-C0603C150F5GACTU, Mouser Price/Stock=https://www.mouser.com/Search/Refine.aspx?Keyword=80-C0603C150F5GACTU
C204 C206 C208 C211 C214: library part C0603C151J4GACTU, "Capacitor", Manufacturer_Name=Kemet, Datasheet Link=https://content.kemet.com/datasheets/KEM_C1003_C0G_SMD.pdf, Height=0.87mm, Manufacturer_Part_Number=C0603C151J4GACTU, Mouser Part Number=80-C0603C151J4G, Mouser Price/Stock=https://www.mouser.com/Search/Refine.aspx?Keyword=80-C0603C151J4G
C212: library part GRM188R61C475KAAJD, "Capacitor", Manufacturer_Name="Murata Electronics", RS Part Number=8847264, Datasheet Link=http://www.murata.com/~/media/webrenewal/support/library/catalog/products/capacitor/mlcc/c02e.pdf, Height=0.9mm, Manufacturer_Part_Number=GRM188R61C475KAAJD, Mouser Part Number=81-GRM188R61C475KAJD, Mouser Price/Stock=https://www.mouser.com/Search/Refine.aspx?Keyword=81-GRM188R61C475KAJD, RS Price/Stock=https://uk.rs-online.com/web/p/products/8847264
C223: library part GRM1887U1A223JA01D, "Capacitor", Manufacturer_Name="Murata Electronics", Datasheet Link=https://psearch.en.murata.com/capacitor/product/GRM1887U1A223JA01%23.html, Height=0.9mm, Manufacturer_Part_Number=GRM1887U1A223JA01D, Mouser Part Number=81-GRM1887U1A223JA1D, Mouser Price/Stock=https://www.mouser.com/Search/Refine.aspx?Keyword=81-GRM1887U1A223JA1D
D31: library part TPD1E10B06DPYT, "Single-Channel ESD in 0402 Package With 10pF Capacitance and 6V Breakdown 2-X1SON -40 to 125", Manufacturer_Name="Texas Instruments", Package="XDFN-2 Texas Instruments", Availability=Unavailable, Datasheet Link=www.ti.com/lit/ds/symlink/tpd1e10b06.pdf, Manufacturer_Part_Number=TPD1E10B06DPYT, Mouser_Part_Number=595-TPD1E10B06DPYT, Price=None, SnapEDA_Link=https://www.snapeda.com/parts/TPD1E10B06DPYT/Texas%20Instruments/view-part/?ref=snap
IC1: library part EFR32BG13P632F512GM48-D, "Integrated Circuit", Manufacturer_Name="Silicon Labs", Datasheet Link=https://componentsearchengine.com/Datasheets/1/EFR32BG13P632F512GM48-D.pdf, Height=0.9mm, Manufacturer_Part_Number=EFR32BG13P632F512GM48-D, Mouser Part Number=634-BGP632F512GM48D, Mouser Price/Stock=https://www.mouser.com/Search/Refine.aspx?Keyword=634-BGP632F512GM48D
IC3: library part LTC3550EDHC#PBF, "Integrated Circuit", Manufacturer_Name="Linear Technology", Datasheet Link=https://www.analog.com/media/en/technical-documentation/data-sheets/3550fa.pdf, Height=0.85mm, Manufacturer_Part_Number=LTC3550EDHC#PBF, Mouser Part Number=584-LTC3550EDHC#PBF, Mouser Price/Stock=https://www.mouser.com/Search/Refine.aspx?Keyword=584-LTC3550EDHC%23PBF
IC5: library part STPM34TR, "Integrated Circuit", Manufacturer_Name=STMicroelectronics, Datasheet Link=http://www.st.com/content/ccc/resource/technical/document/datasheet/d9/c1/c6/3d/09/7f/4f/7b/DM00111861.pdf/files/DM00111861.pdf/jcr:content/translations/en.DM00111861.pdf, Height=1mm, Manufacturer_Part_Number=STPM34TR, Mouser Part Number=511-STPM34TR, Mouser Price/Stock=https://www.mouser.com/Search/Refine.aspx?Keyword=511-STPM34TR
IC6: library part FOD8012AR2, "Integrated Circuit", Manufacturer_Name="Fairchild Semiconductor", Datasheet Link=https://www.onsemi.com/pub/Collateral/FOD8012A-D.pdf, Height=3.63mm, Manufacturer_Part_Number=FOD8012AR2, Mouser Part Number=512-FOD8012AR2, Mouser Price/Stock=https://www.mouser.com/Search/Refine.aspx?Keyword=512-FOD8012AR2
IC7 IC8: library part FOD8001, "Integrated Circuit", Manufacturer_Name="Fairchild Semiconductor", Datasheet Link=https://www.mouser.com/ds/2/308/FOD8001-1124391.pdf, Height=3.63mm, Manufacturer_Part_Number=FOD8001, Mouser Part Number=512-FOD8001, Mouser Price/Stock=https://www.mouser.com/Search/Refine.aspx?Keyword=512-FOD8001
J2: library part UJ2-MIBH2-4-SMT-TR, "Micro B, USB 2.0, 1.8 A, Right Angle, Surface Mount _SMT_, USB Receptacle", Manufacturer_Name="CUI Devices", Package=None, CUI_purchase_URL=https://www.cuidevices.com/product/interconnect/connectors/usb-connectors/uj2-mibh2-4-smt?utm_source=snapeda.com&utm_medium=referral&utm_campaign=snapedaBOM, Datasheet Link=https://www.mouser.com/datasheet/2/670/uj2-mibh2-4-smt-1313423.pdf, Manufacturer_Part_Number=UJ2-MIBH2-4-SMT-TR, Mouser Part Number=490-UJ2-MIBH2-4-SMT, SnapEDA_Link=https://www.snapeda.com/parts/UJ2-MIBH2-4-SMT-TR/CUI%20Devices/view-part/?ref=snap
J3 J7 J8: library part 691508110302, "5081 Series 3.5mm Pitch Horizontal, PCBTerminal Block, Surface Mount, 2 Way", Manufacturer_Name="Wurth Electronics", Datasheet Link=https://www.mouser.com/datasheet/2/445/6915081103xx-469297.pdf, Manufacturer_Part_Number=691508110302, Mouser Part Number=710-691508110302
J6: library part 87898-0306, "Connector", Manufacturer_Name=Molex, Allied_Number=71465806, Allied Price/Stock=https://www.alliedelec.com/molexincorporated-87898-0306/71465806/, Datasheet Link=http://www.molex.com/pdm_docs/sd/878980306_sd.pdf, Height=10.81mm, Manufacturer_Part_Number=87898-0306, Mouser Part Number=538-87898-0306, Mouser Price/Stock=https://www.mouser.com/Search/Refine.aspx?Keyword=538-87898-0306
J101: library part FTSH-105-01-F-DV-K, "Connector", Manufacturer_Name=SAMTEC, RS Part Number=1592372, Datasheet Link=http://suddendocs.samtec.com/prints/ftsh-1xx-xx-xxx-dv-xxx-xxx-mkt.pdf, Manufacturer_Part_Number=FTSH-105-01-F-DV-K, Mouser Part Number=200-FTSH10501FDVK, Mouser Price/Stock=https://www.mouser.com/Search/Refine.aspx?Keyword=200-FTSH10501FDVK, RS Price/Stock=http://uk.rs-online.com/web/p/products/1592372
J103: library part 87898-0424, "Connector", Manufacturer_Name=Molex, Allied_Number=71465829, Allied Price/Stock=https://www.alliedelec.com/molexincorporated-87898-0424/71465829/, Datasheet Link=https://componentsearchengine.com/Datasheets/1/87898-0424.pdf, Height=9.65mm, Manufacturer_Part_Number=87898-0424, Mouser Part Number=538-87898-0424, Mouser Price/Stock=https://www.mouser.com/Search/Refine.aspx?Keyword=538-87898-0424
J104 J105: library part 87898-0204, "Connector", Manufacturer_Name=Molex, Allied_Number=70967354, Allied Price/Stock=https://www.alliedelec.com/molex-incorporated-87898-0204/70967354/, Datasheet Link=https://www.molex.com/pdm_docs/sd/878980204_sd.pdf, Height=8.33mm, Manufacturer_Part_Number=87898-0204, Mouser Part Number=538-87898-0204, Mouser Price/Stock=https://www.mouser.com/Search/Refine.aspx?Keyword=538-87898-0204
L2: library part SLF6028T-4R7M1R6-PF, "Inductor", Manufacturer_Name=TDK, RS Part Number=7413399P, Datasheet Link=https://product.tdk.com/info/en/document/catalog/smd/inductor_commercial_power_slf6028_en.pdf, Height=3mm, Manufacturer_Part_Number=SLF6028T-4R7M1R6-PF, Mouser Part Number=810-SLF6028T-4R7M, Mouser Price/Stock=https://www.mouser.com/Search/Refine.aspx?Keyword=810-SLF6028T-4R7M, RS Price/Stock=http://uk.rs-online.com/web/p/products/7413399P
L101 L102: library part LQP03TQ1N9C02D, "Inductor", Manufacturer_Name="Murata Electronics", Datasheet Link=https://psearch.en.murata.com/inductor/product/LQP03TQ1N9C02%23.html, Height=0.6mm, Manufacturer_Part_Number=LQP03TQ1N9C02D
L103: library part KLZ1608MHR4R7WTD25, "Inductor", Manufacturer_Name=TDK, Datasheet Link=http://www.mouser.com/datasheet/2/400/nductor_automotive_decoupling_klz1608-hr_en-1108665.pdf, Height=0.95mm, Manufacturer_Part_Number=KLZ1608MHR4R7WTD25, Mouser Part Number=810-KLZ1608MHR4R7WTD, Mouser Price/Stock=https://www.mouser.com/Search/Refine.aspx?Keyword=810-KLZ1608MHR4R7WTD
L104 L105: library part BLM18AG601SN1D, "Filter", Manufacturer_Name="Murata Electronics", RS Part Number=0110380, Datasheet Link=https://www.murata.com/en-us/products/productdetail?partno=BLM18AG601SN1%23, Height=0.95mm, Manufacturer_Part_Number=BLM18AG601SN1D, Mouser Part Number=81-BLM11A601S, Mouser Price/Stock=https://www.mouser.com/Search/Refine.aspx?Keyword=81-BLM11A601S, RS Price/Stock=http://uk.rs-online.com/web/p/products/0110380
L106: library part 74279266, "Ferrite Bead", Manufacturer_Name="Wurth Elektronik", RS Part Number=1241858P, Datasheet Link=http://uk.rs-online.com/web/p/products/3674856, Height=1mm, Manufacturer_Part_Number=74279266, Mouser Part Number=710-74279266, Mouser Price/Stock=https://www.mouser.com/Search/Refine.aspx?Keyword=710-74279266, RS Price/Stock=http://uk.rs-online.com/web/p/products/1241858P
LED2: library part HSMC-C190, "LED", Manufacturer_Name="Avago Technologies", RS Part Number=6910391P, Datasheet Link=http://www.mouser.hk/ProductDetail/Broadcom-Avago/HSMC-C190/?qs=YDL0qNrpDT4TTmzDJNXHWQ==, Height=0.9mm, Manufacturer_Part_Number=HSMC-C190, Mouser Part Number=630-HSMC-C190, Mouser Price/Stock=https://www.mouser.com/Search/Refine.aspx?Keyword=630-HSMC-C190, RS Price/Stock=http://uk.rs-online.com/web/p/products/6910391P
P101: library part U.FL-R-SMT-1(10), "Connector", Manufacturer_Name=Hirose, RS Part Number=0557981, Datasheet Link=https://www.hirose.com/product/en/download_file/key_name/U.FL-R-SMT-1%2810%29/category/Drawing%20(2D)/doc_file_id/37627/?file_category_id=6&item_id=03310472210&is_series=, Manufacturer_Part_Number=U.FL-R-SMT-1(10), Mouser Part Number=798-U.FL-R-SMT-110, Mouser Price/Stock=https://www.mouser.com/Search/Refine.aspx?Keyword=798-U.FL-R-SMT-110, RS Price/Stock=http://uk.rs-online.com/web/p/products/0557981
PS1: library part IRM-03-3.3S, "Power Supply", Manufacturer_Name="Mean Well", Datasheet Link=https://www.meanwell.com/Upload/PDF/IRM-03/IRM-03-SPEC.PDF, Height=16mm, Manufacturer_Part_Number=IRM-03-3.3S, Mouser Part Number=709-IRM03-3.3S, Mouser Price/Stock=https://www.mouser.com/Search/Refine.aspx?Keyword=709-IRM03-3.3S
R31 R34: library part MCT06030D2201BP100, "Resistor", Manufacturer_Name=Vishay, RS Part Number=6845474, Allied_Number=70398207, Allied Price/Stock=https://www.alliedelec.com/vishay-dale-mct06030d2201bp100/70398207/, Datasheet Link=http://www.vishay.com/docs/28705/mcx0x0xpro.pdf, Height=0.55mm, Manufacturer_Part_Number=MCT06030D2201BP100, Mouser Part Number=594-MCT06030D2201BP1, Mouser Price/Stock=https://www.mouser.com/Search/Refine.aspx?Keyword=594-MCT06030D2201BP1, RS Price/Stock=https://uk.rs-online.com/web/p/products/6845474
R32: library part ERA-3ARB112V, "Resistor", Manufacturer_Name=Panasonic, Datasheet Link=https://industrial.panasonic.com/cdbs/www-data/pdf/RDM0000/AOA0000C307.pdf, Height=0.55mm, Manufacturer_Part_Number=ERA-3ARB112V, Mouser Part Number=667-ERA-3ARB112V, Mouser Price/Stock=https://www.mouser.com/Search/Refine.aspx?Keyword=667-ERA-3ARB112V
R33: library part MCT0603MD1001BP500, "Resistor", Manufacturer_Name=Vishay, Datasheet Link=http://www.vishay.com/docs/28705/mcx0x0xpro.pdf, Height=0.55mm, Manufacturer_Part_Number=MCT0603MD1001BP500, Mouser Part Number=594-MCT0603MD1001BP5, Mouser Price/Stock=https://www.mouser.com/Search/Refine.aspx?Keyword=594-MCT0603MD1001BP5
R35: library part TNPW12061M35BETA, "Res Thin Film 1206 1.35M Ohm 0.1% 0.25W_1/4W_ ±25ppm/C Molded SMD Paper T/R", Manufacturer_Name=Vishay, Manufacturer_Part_Number=TNPW12061M35BEEN, Package="3216 Rohm Semiconductor", Availability=Unavailable, Datasheet Link=https://www.mouser.com/datasheet/2/427/tnpw_e3-470510.pdf, Mouser Part Number=71-TNPW12061M35BEEN, Price=None, SnapEDA_Link=https://www.snapeda.com/parts/TNPW12061M35BETA/Vishay/view-part/?ref=snap
R36: library part ERA-3AEB3013V, "Resistor", Manufacturer_Name=Panasonic, Datasheet Link=https://industrial.panasonic.com/cdbs/www-data/pdf/RDM0000/AOA0000C307.pdf, Height=0.55mm, Manufacturer_Part_Number=ERA-3AEB3013V, Mouser Part Number=667-ERA-3AEB3013V, Mouser Price/Stock=https://www.mouser.com/Search/Refine.aspx?Keyword=667-ERA-3AEB3013V
R101: library part CRGS0603J1R0, "Resistor", Manufacturer_Name="TE Connectivity", RS Part Number=9044983P, Datasheet Link=http://www.te.com/commerce/DocumentDelivery/DDEController?Action=showdoc&DocId=Data+Sheet%7F9-1773463-8%7FB%7Fpdf%7FEnglish%7FENG_DS_9-1773463-8_B.pdf%7F3-2176243-7, Height=0.55mm, Manufacturer_Part_Number=CRGS0603J1R0, Mouser Part Number=279-CRGS0603J1R0, Mouser Price/Stock=https://www.mouser.com/Search/Refine.aspx?Keyword=279-CRGS0603J1R0, RS Price/Stock=http://uk.rs-online.com/web/p/products/9044983P
R102 R104 R202: library part CRCW12060000Z0EAC, "Resistor", Manufacturer_Name=Vishay, Datasheet Link=http://componentsearchengine.com/Datasheets/1/CRCW12060000Z0EAC.pdf, Height=0.6mm, Manufacturer_Part_Number=CRCW12060000Z0EAC, Mouser Part Number=71-CRCW12060000Z0EAC, Mouser Price/Stock=https://www.mouser.com/Search/Refine.aspx?Keyword=71-CRCW12060000Z0EAC
R201: library part MCT06030C1004FP500, "Resistor", Manufacturer_Name=Vishay, Datasheet Link=http://www.vishay.com/docs/28705/mcx0x0xpro.pdf, Height=0.55mm, Manufacturer_Part_Number=MCT06030C1004FP500, Mouser Part Number=594-MCT06030C1004FP5, Mouser Price/Stock=https://www.mouser.com/Search/Refine.aspx?Keyword=594-MCT06030C1004FP5
R203 R204 R205 R206: library part MCT0603MD1002BP500, "Resistor", Manufacturer_Name=Vishay, Datasheet Link=http://www.vishay.com/docs/28705/mcx0x0xpro.pdf, Height=0.55mm, Manufacturer_Part_Number=MCT0603MD1002BP500, Mouser Part Number=594-MCT0603MD1002BP5, Mouser Price/Stock=https://www.mouser.com/Search/Refine.aspx?Keyword=594-MCT0603MD1002BP5
R207 R208: library part MCT0603PD1001DP500, "Resistor", Manufacturer_Name=Vishay, Datasheet Link=http://www.vishay.com/docs/28705/mcx0x0xpro.pdf, Height=0.55mm, Manufacturer_Part_Number=MCT0603PD1001DP500, Mouser Part Number=594-MCT0603PD1001DP5, Mouser Price/Stock=https://www.mouser.com/Search/Refine.aspx?Keyword=594-MCT0603PD1001DP5
R209: library part CPF0603B5R9E1, "Resistor", Manufacturer_Name="TE Connectivity", RS Part Number=1235327, Datasheet Link=http://www.farnell.com/datasheets/1786775.pdf, Height=0.55mm, Manufacturer_Part_Number=CPF0603B5R9E1, Mouser Part Number=279-CPF0603B5R9E1, RS Price/Stock=https://uk.rs-online.com/web/p/products/1235327
R210 R211 R212: library part MCT06030C2703FP500, "Resistor", Manufacturer_Name=Vishay, Datasheet Link=http://www.vishay.com/docs/28705/mcx0x0xpro.pdf, Height=0.55mm, Manufacturer_Part_Number=MCT06030C2703FP500, Mouser Part Number=594-MCT06030C2703FP5, Mouser Price/Stock=https://www.mouser.com/Search/Refine.aspx?Keyword=594-MCT06030C2703FP5
R213: library part ERA-3APB471V, "Resistor", Manufacturer_Name=Panasonic, Allied_Number=70360364, Allied Price/Stock=https://www.alliedelec.com/panasonic-era3apb471v/70360364/, Datasheet Link=https://industrial.panasonic.com/cdbs/www-data/pdf/RDM0000/AOA0000C307.pdf, Height=0.55mm, Manufacturer_Part_Number=ERA-3APB471V, Mouser Part Number=667-ERA-3APB471V, Mouser Price/Stock=https://www.mouser.com/Search/Refine.aspx?Keyword=667-ERA-3APB471V
S101: library part LL3301AF065QJ, "Switch", Manufacturer_Name=E-Switch, Datasheet Link=https://media.digikey.com/pdf/Data%20Sheets/E-Switch%20PDFs/LL3301AF065QJ.pdf, Height=7.3mm, Manufacturer_Part_Number=LL3301AF065QJ, Mouser Part Number=612-LL3301AF065QJ, Mouser Price/Stock=https://www.mouser.com/Search/Refine.aspx?Keyword=612-LL3301AF065QJ
Y101: library part ECS-384-8-36Q-CKY-TR, "Crystal 38.4mhz 8pf Smd", Manufacturer_Name="ECS Inc.", Package="SMD-4 ECS International", Availability=Unavailable, Manufacturer_Part_Number=ECS-384-8-36Q-CKY-TR, Mouser Part Number=520-384-8-36Q-CKYT, Mouser Price/Stock=https://www.mouser.com/ProductDetail/ECS/ECS-384-8-36Q-CKY-TR?qs=%2Fha2pyFaduieYLvRCOUxDiycX6RSF1FiuS1QhwWyXzrQsIptGqg3hkPASiWtTF8J, Price=None, SnapEDA_Link=https://www.snapeda.com/parts/ECS-384-8-36Q-CKY-TR/ECS%20Inc./view-part/?ref=snap
Y102: library part CM8V-T1A-32.768kHz-9pF-20PPM-TA-QC, "Crystal or Oscillator", Manufacturer_Name="MICRO CRYSTAL", Datasheet Link=https://www.mouser.co.uk/datasheet/2/530/cm8v-t1a-1085761.pdf, Manufacturer_Part_Number=CM8V-T1A-32.768kHz-9pF-20PPM-TA-QC, Mouser Part Number=428-201410-MC01, Mouser Price/Stock=https://www.mouser.com/Search/Refine.aspx?Keyword=428-201410-MC01
Y201: library part ECS-160-8-36B-CKY-TR, "Crystal or Oscillator", Manufacturer_Name=ECS, Datasheet Link=https://ecsxtal.com/store/pdf/ECX-2236B.pdf, Height=0mm, Manufacturer_Part_Number=ECS-160-8-36B-CKY-TR, Mouser Part Number=520-160-8-36B-CKYT, Mouser Price/Stock=https://www.mouser.com/Search/Refine.aspx?Keyword=520-160-8-36B-CKYT

## Via types
v1: diameter 24, hole 12, Top Layer to Bottom Layer, tented both sides, 422 vias
v2: diameter 28, hole 14, Top Layer to Bottom Layer, tented both sides, 3 vias

## Nets (pads, with @x,y where several pads share a name; then routed paths per layer and width w, separated by ;. In a path a pad name is that pad's centre, name@x,y a point inside that pad or via, vN(x,y) a via of type N, cw(c..) or ccw(c..) an arc to the next point about the centre after c; other vN are vias at no path point)
2G4RF_IOP: IC1.17 L102.1 | length 389.2
  Top Layer w8: L102.1@500,2607.2 500,2510 595,2415 685,2415 705,2435 743.7,2435 IC1.17@744.17,2434.53
AVDD: C113.2 C123.2 IC1.34 R101.1 | length 539.5
  Top Layer w10: IC1.34@948.9,2269.17 948.9,2211.1 1035,2125 1150,2125 1207.56,2182.56 C123.2@1240,2182.56
  Top Layer w20: C113.2@1310,2177.56 1415.94,2177.56 R101.1@1433.5,2160
BAT_S: C32.1 IC3.7 IC3.11 IC3.13 IC3.15 J3.2 R33.1 | length 3629.4
  Top Layer w8: IC3.15@3289.01,2010.83 IC3.15@3290.79,2012.61 ; IC3.13@3330.16,2009.06 3330.16,2050.16 ; 3330.16,2054.84 3330.16,2050.16 ; IC3.11@3369.53,2009.06 3369.53,2050.47 3360,2060 3340,2060 3330.16,2050.16
  Top Layer w10: v1(3005,1935) 3005,1615 3060,1560 3155,1560 3185,1530 3185,1095 3210,1070 3265,1070 J3.2@3323.9,1128.9 ; v1(3100,2030) 3100,2060 ; C32.1@3110,2144.88 3110,2105 3145,2070 ; R33.1@3240,1127.01 3241.89,1128.9 J3.2@3323.9,1128.9 ; IC3.15@3290.79,2012.61 3290.79,2044.21 3265,2070 3145,2070 ; 3330.16,2054.84 3240,2145 3240,2250.91 3188.91,2302 3107,2302 3055,2250 3055,2105 3100,2060 ; IC3.7@3389.21,1890.94 3389.21,1746.24 3430.23,1705.23 3574.77,1705.23 3605,1675 3605,1560 3410.12,1365.12 J3.2@3410.12,1128.9 J3.2@3323.9,1128.9 ; 3100,2060 3125,2060 3135,2070 3145,2070
  Bottom Layer w10: v1(3005,1935) v1(3100,2030)